# Altium PCB bop_it_pcb.PcbDoc
Units mil, origin at the board's own origin, x right, y up, seen from the top; angles counter-clockwise.
Board outline 2245 x 3290 mil, 2 copper layers (Top Layer, Bottom Layer); 23 components, 18 nets, 75 pads, 0 vias.
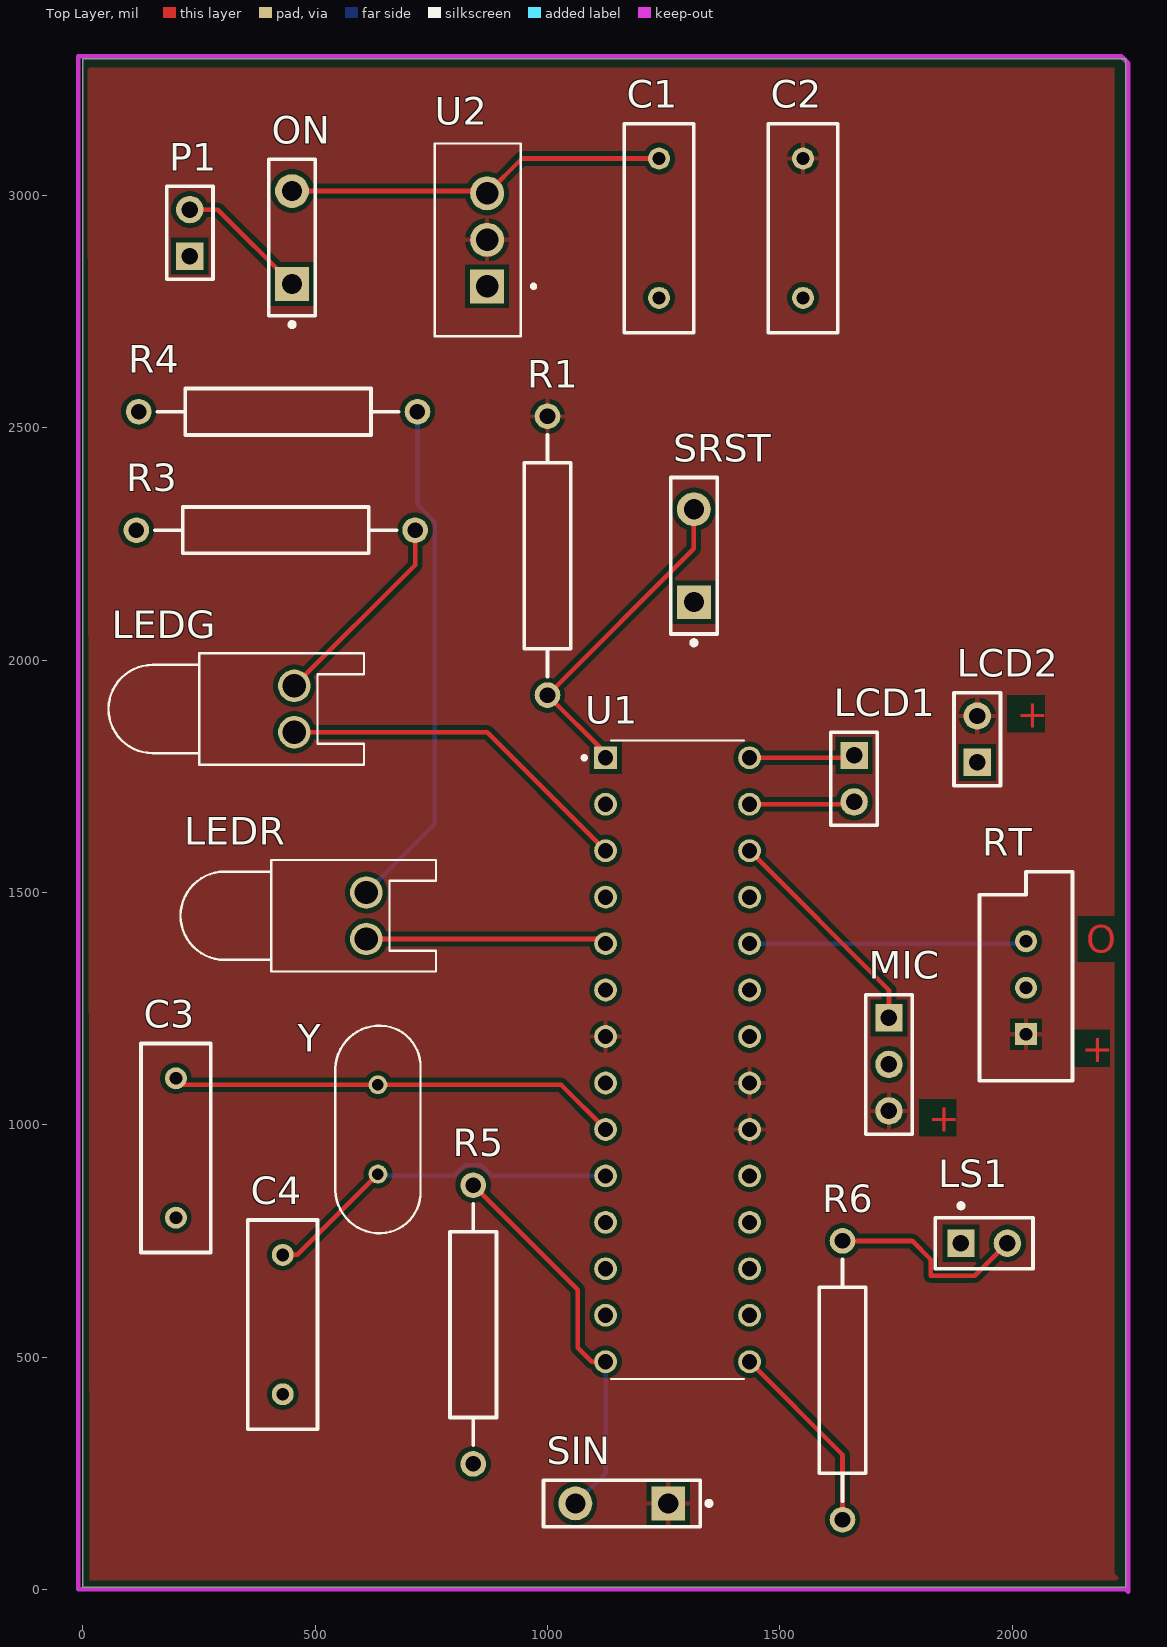
[diagram p0: Top Layer view]
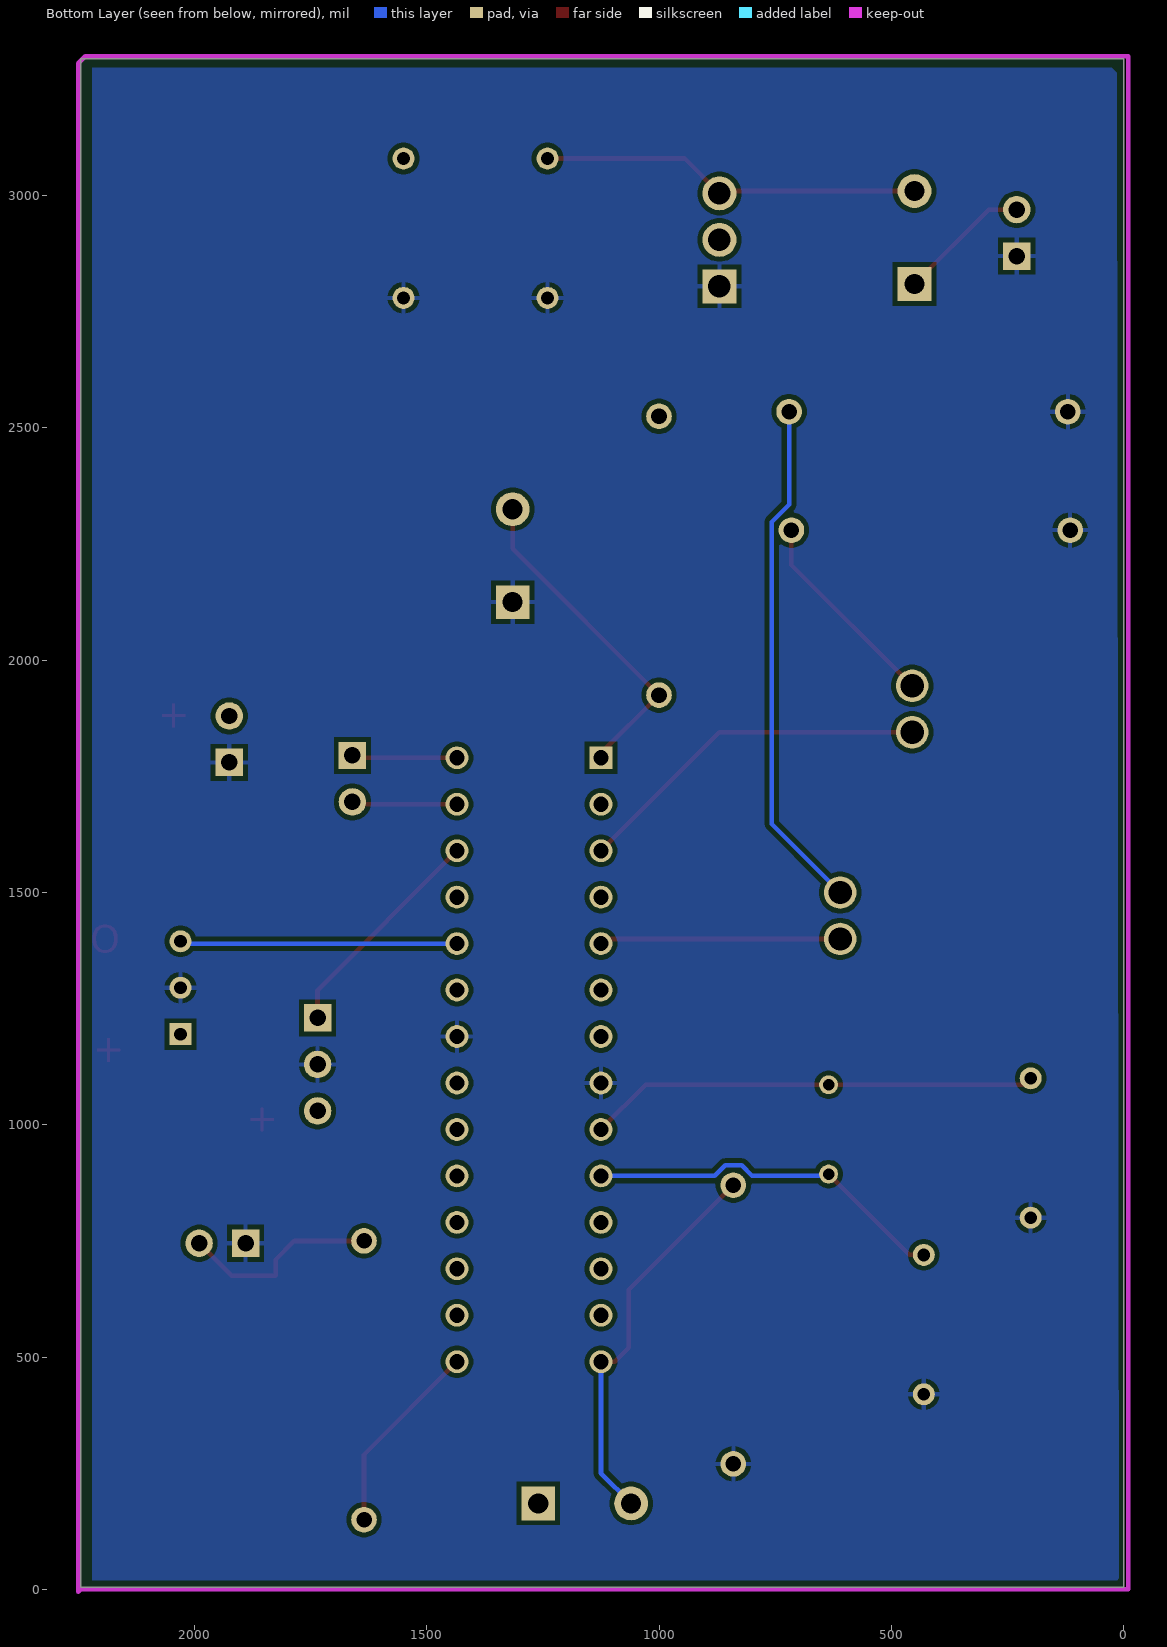
[diagram p1: Bottom Layer view, seen from below]

## Layer stack, top to bottom
Top Solder: solder mask 0.4, Solder Resist, Dk 3.5
Top Layer: signal copper 1.4
Dielectric 1: dielectric 12.6, FR-4, Dk 4.8
Bottom Layer: signal copper 1.4
Bottom Solder: solder mask 0.4, Solder Resist, Dk 3.5

## Board outline
0,5 2245,5 2245,3295 0,3295

## Design rules (kind name [scope] priority, off if disabled: settings)
BoardOutlineClearance [All] p1: gap=7.87 ignorepadtopadclearanceinfootprint=FALSE except(15.75: Arc-SplitBarrior Arc-SplitContinuation Track-SplitBarrior Track-SplitContinuation SMDPad-SplitBarrior SMDPad-SplitContinuation THPad-SplitBarrior THPad-SplitContinuation Via-SplitBarrior Via-SplitContinuation Fill-SplitBarrior Fill-SplitContinuation Poly-SplitBarrior Poly-SplitContinuation Region-SplitBarrior Region-SplitContinuation Text-SplitBarrior Text-SplitContinuation)
Clearance "Clearance Bottom Layer" [OnLayer('Bottom Layer')] p1: gap=8 ignorepadtopadclearanceinfootprint=TRUE except(10: Arc-Text Track-Text SMDPad-Text THPad-Text Via-Text Fill-Text Poly-Text Region-Text Text-Text)
Clearance "Clearance Top Layer" [OnLayer('Top Layer')] p2: gap=8 ignorepadtopadclearanceinfootprint=TRUE except(10: Arc-Text Track-Text SMDPad-Text THPad-Text Via-Text Fill-Text Poly-Text Region-Text Text-Text)
Clearance [All] p3: gap=7.87 ignorepadtopadclearanceinfootprint=FALSE except(3.5: Arc-Arc Arc-Track Arc-SMDPad Track-Track Track-SMDPad SMDPad-SMDPad; 5: Arc-Via Track-Via SMDPad-Via THPad-Via Via-Via; 10: Arc-Text Track-Text SMDPad-Text THPad-Text Via-Text Fill-Text Poly-Text Region-Text Text-Text)
HoleSize [All] p1: absolutevalues=TRUE maxlimit=248.03 minlimit=7.87 maxpercent=80.000 minpercent=20.000
MinimumAnnularRing [All] p1: minimumring=3
MinimumSolderMaskSliver [All] p1: minsoldermaskwidth=3.94
PolygonConnect PolygonConnect_1 [All] p1: thpad.connectstyle=Relief thpad.reliefconductorwidth=20 thpad.reliefentries=4 thpad.polygonreliefangle="90 Angle" thpad.airgapwidth=10 smdpad.connectstyle=Relief smdpad.reliefconductorwidth=20 smdpad.reliefentries=4 smdpad.polygonreliefangle="90 Angle" smdpad.airgapwidth=10 via.connectstyle=Direct via.reliefconductorwidth=20 via.reliefentries=4 via.polygonreliefangle="90 Angle" via.airgapwidth=10
RoutingCorners [All] p1: cornerstyle=Round minsetback=100 maxsetback=100
RoutingVias [All] p1: holewidth=19.68 width=39.37 viastyle="Through Hole" minholewidth=7.87 minwidth=17.72 maxholewidth=39.37 maxwidth=78.74
SilkToSilkClearance [All] p1: silktosilkclearance=3.94
SilkToSolderMaskClearance [IsPad] p1: minsilkscreentomaskgap=3.94 clearancetoexposedcopper=TRUE
SolderMaskExpansion [All] p1: expansion=4 istentingtop=FALSE
Width [All] p1: maxlimit=100 minlimit=3.5 preferedwidth=15
25 further rules are at their usual default settings.

## Components (designator, comment, footprint, x,y, rotation, side; value= is the part's Value field where it differs from the comment)
C1 "Cap" RAD-0.3 1240,2930 r90 top value=10uF
C2 "Cap" RAD-0.3 1550,2930 r90 top value=10uF
C3 "Cap" RAD-0.3 200,950 r90 top value=22pF
C4 "Cap" RAD-0.3 430,570 r90 top value=22pF
LCD1 "Header 2" HDR1X2 1660,1795 r270 top
LCD2 "Header 2" HDR1X2 1925,1780 r90 top
LEDG "LED0" LED-0 455,1895 r270 top
LEDR "LED0" LED-0 610,1450 r270 top
LS1 "Speaker" PIN2 1890,745 r0 top
MIC "Header 3" HDR1X3 1735,1230 r270 top
ON "SW-SPST" SPST-2 450,2910 r90 top
P1 "Header 2" HDR1X2 230,2870 r90 top
R1 "Res Adj2" AXIAL-0.6 1000,2225 r90 top value=1K
R3 "Res Adj2" AXIAL-0.6 415,2280 r180 top value=1K
R4 "Res Adj2" AXIAL-0.6 420,2535 r180 top value=1K
R5 "Res Adj2" AXIAL-0.6 840,570 r90 top value=1K
R6 "Res Adj2" AXIAL-0.6 1635,450 r270 top value=1K
RT "RPot" VR5 2030,1295 r90 top value=1K
SIN "SW-PB" SPST-2 1160,185 r180 top
SRST "SW-PB" SPST-2 1315,2225 r90 top
U1 "ATMEGA328-PU" DIP787W46P254L3467H508Q28 1280,1140 r0 top
U2 "7805" TO254P1054X470X1955-3 870,2905 r90 top
Y "ECS-240.0001-18-1X" XTAL_ECS-200-20-1X 635,990 r90 top

## Footprints (in the part's own frame and the unit in brackets; to place one, negate y for a bottom-side part, rotate by r counter-clockwise, add the part's x,y. Pads: shape width x height; smd on the part's side, far side on the other; paste and mask are expansions set on the pad)
AXIAL-0.6 [mm] "Axial Device, Thru-Hole; 2 Leads; 0.6 in Pin Spacing"
  round 1.4 hole 0.85: 1(-7.62,0) 2(7.62,0)
  silkscreen extent -6.6,-1.27 6.6,1.27
DIP787W46P254L3467H508Q28 [mm]
  rect 1.25x1.25 hole 0.83: 1(-3.937,16.51)
  round 1.25 hole 0.83: 2(-3.937,13.97) 3(-3.937,11.43) 4(-3.937,8.89) 5(-3.937,6.35) 6(-3.937,3.81) 7(-3.937,1.27) 8(-3.937,-1.27) 9(-3.937,-3.81) 10(-3.937,-6.35) 11(-3.937,-8.89) 12(-3.937,-11.43) 13(-3.937,-13.97) 14(-3.937,-16.51) 15(3.937,-16.51) 16(3.937,-13.97) 17(3.937,-11.43) 18(3.937,-8.89) 19(3.937,-6.35) 20(3.937,-3.81) 21(3.937,-1.27) 22(3.937,1.27) 23(3.937,3.81) 24(3.937,6.35) 25(3.937,8.89) 26(3.937,11.43) 27(3.937,13.97) 28(3.937,16.51)
  silkscreen extent -5.2,-17.45 3.62,17.45, body extent -5.08,-17.34 5.08,17.34, height 4.57
HDR1X2 [mm] "Connector; Header; 2 Position"
  rect 1.5x1.5 hole 0.9: 1(0,0)
  round 1.5 hole 0.9: 2(2.54,0)
  silkscreen extent -1.27,-1.27 3.81,1.27
HDR1X3 [mm] "Connector; Header; 3 Position"
  rect 1.5x1.5 hole 0.9: 1(0,0)
  round 1.5 hole 0.9: 2(2.54,0) 3(5.08,0)
  silkscreen extent -1.27,-1.27 6.35,1.27
LED-0 [mil] "LED; 2 Leads"
  round 70 hole 50: 1(50,0) 2(-50,0)
  silkscreen extent -120,-400 120,150
PIN2 [mm] "Photosensitive Diode; 2 Leads"
  rect 1.5x1.5 hole 0.9: 1(0,0)
  round 1.5 hole 0.9: 2(2.54,0)
  silkscreen extent -1.4,-1.4 3.94,2.17
RAD-0.3 [mm] "Radial Cap, Thru-Hole; 2 Leads; 0.3 in Pin Spacing"
  round 1.2 hole 0.7: 1(-3.81,0) 2(3.81,0)
  silkscreen extent -5.71,-1.91 5.71,1.91
SPST-2 [mm] "Switch; 2 Leads"
  rect 1.85x1.85 hole 1.1: 1(-2.54,0)
  round 1.85 hole 1.1: 2(2.54,0)
  silkscreen extent -4.89,-1.27 4.28,1.27
TO254P1054X470X1955-3 [mm]
  rect 1.86x1.86 hole 1.24: 1(-2.54,0)
  round 1.86 hole 1.24: 2(0,0) 3(2.54,0)
  silkscreen extent -5.27,-2.64 5.27,2.86, body extent -5.08,-2.29 5.08,2.29, height 19.56
VR5 [mm] "Thru-Hole; 3 Leads"
  rect 1.2x1.2 hole 0.7: 1(-2.54,0)
  round 1.2 hole 0.7: 2(0,0) 3(2.54,0)
  silkscreen extent -5.08,-2.54 6.35,2.54
XTAL_ECS-200-20-1X [mm]
  round 1.03 hole 0.63: 1(-2.44,0) 2(2.44,0)
  silkscreen extent -5.68,-2.33 5.68,2.33

## Part data
C1 C2 C3 C4: "Capacitor", LatestRevisionDate=17-Jul-2002, LatestRevisionNote="Re-released for DXP Platform.", PackageDescription="Radial Cap, Thru-Hole; 2 Leads; 0.3 in Pin Spacing", PackageReference=RAD-0.3, Published=8-Jun-2000, Publisher="Altium Limited"
LCD1 LCD2 P1: "Header, 2-Pin", LatestRevisionDate=17-Jul-2002, LatestRevisionNote="Re-released for DXP Platform.", Publisher="Altium Limited"
LEDG LEDR: "Typical INFRARED GaAs LED", LatestRevisionDate=08-Jul-2005, LatestRevisionNote="Mech Layer 1 removed.", PackageDescription="LED; 2 Leads", PackageReference=LED-0, Published=8-Jun-2000, Publisher="Altium Limited"
LS1: "Loudspeaker", LatestRevisionDate=17-Jul-2002, LatestRevisionNote="Re-released for DXP Platform.", PackageReference=PIN2, Published=24-Mar-1999, Publisher="Altium Limited"
MIC: "Header, 3-Pin", LatestRevisionDate=17-Jul-2002, LatestRevisionNote="Re-released for DXP Platform.", Publisher="Altium Limited"
ON: "Single-Pole, Single-Throw Switch", LatestRevisionDate=17-Jul-2002, LatestRevisionNote="Re-released for DXP Platform.", PackageDescription="Switch; 2 Leads", PackageReference=SPST-2, Published=24-Mar-1999, Publisher="Altium Limited"
R1 R3 R4 R5 R6: "Variable Resistor", LatestRevisionDate=17-Jul-2002, LatestRevisionNote="Re-released for DXP Platform.", PackageDescription="Axial Device, Thru-Hole; 2 Leads; 0.6 in Pin Spacing", PackageReference=AXIAL-0.6, Published=8-Jun-2000, Publisher="Altium Limited", Set Position=0.5
RT: "Potentiometer", LatestRevisionDate=17-Jul-2002, LatestRevisionNote="Re-released for DXP Platform.", PackageDescription="Variable Resistor, Thru-Hole; 3 Leads", PackageReference=VR5, Published=8-Jun-2000, Publisher="Altium Limited", Set Position=0.5, Sim Note="Enter the Resistance value and the set point into parameter fields."
SIN SRST: "Switch", LatestRevisionDate=17-Jul-2002, LatestRevisionNote="Re-released for DXP Platform.", PackageDescription="Switch; 2 Leads", PackageReference=SPST-2, Published=24-Mar-1999, Publisher="Altium Limited"
U1: "AVR AVRÂ® ATmega Microcontroller IC 8-Bit 20MHz 32KB (16K x 16) FLASH 28-PDIP", Package="DIP-28 Microchip Technology", Availability=Good, Check_prices=https://www.snapeda.com/parts/ATMEGA328-PU/Microchip/view-part/4833845/?ref=eda, MF="Microchip Technology", MP=ATMEGA328-PU, Price=None, Purchase-URL=https://pricing.snapeda.com/search/part/ATMEGA328-PU/?ref=eda, SnapEDA_Link=https://www.snapeda.com/parts/ATMEGA328-PU/Microchip/view-part/4833845/?ref=snap
U2: library part LM1085IT-5.0, "3-A, 29-V, linear voltage regulator 3-TO-220", Package="TO-220-3 Texas Instruments", Availability=Warning, MF="Texas Instruments", MP=LM1085IT-5.0, Price=None, Purchase-URL=https://pricing.snapeda.com/search/part/LM1085IT-5.0/?ref=eda, SnapEDA_Link=https://www.snapeda.com/parts/LM1085IT-5.0/Texas%20Instruments/view-part/226095/?ref=snap
Y: "Crystals / Oscillators / Resonators 24.00014MHz 18pF", Package="HC49/U ECS International", Availability=Unavailable, MF="ECS International", MP=ECS-240.0001-18-1X, Price=None, SnapEDA_Link=https://www.snapeda.com/parts/ECS-240.0001-18-1X/ECS%20International/view-part/259232/?ref=snap

## Nets (pads, with @x,y where several pads share a name; then routed paths per layer and width w, separated by ;. In a path a pad name is that pad's centre, name@x,y a point inside that pad or via, vN(x,y) a via of type N, cw(c..) or ccw(c..) an arc to the next point about the centre after c; other vN are vias at no path point)
GND: C1.1 C2.1 C3.1 C4.1 LCD2.1 LS1.1 MIC.2 P1.1 R3.2 R4.2 R5.1 RT.2 SRST.1 U1.8 U1.22 U2.1
NetC1_2: C1.2 ON.2 U2.3 | length 823.1
  Top Layer w10: ON.2 865,3010 U2.3 945,3080 C1.2
NetC3_2: C3.2 U1.9 Y.2 | length 970.6
  Top Layer w10: C3.2 213.94,1086.06 1028.94,1086.06 U1.9
NetC4_2: C4.2 U1.10 Y.1 | length 787.4
  Top Layer w10: C4.2 461.06,720 Y.1
  Bottom Layer w10: Y.1 638.94,890 799.81,890 822.37,912.56 857.63,912.56 880.19,890 U1.10
NetLEDG_1: LEDG.1 U1.3 | length 775.6
  Top Layer w10: LEDG.1 870,1845 U1.3
NetLEDG_2: LEDG.2 R3.1 | length 442.7
  Top Layer w10: LEDG.2 715,2205 R3.1
NetLEDR_1: LEDR.1 U1.5 | length 519.1
  Top Layer w10: LEDR.1 1115,1400 U1.5
NetLEDR_2: LEDR.2 R4.1 | length 1111.7
  Bottom Layer w10: LEDR.2 757.56,1647.56 757.56,2297.63 720,2335.19 R4.1
NetLS1_2: LS1.2 R6.1 | length 435.6
  Top Layer w10: R6.1 1785,750 1825,710 1825,675 1920,675 LS1.2
NetMIC_1: MIC.1 U1.26 | length 484.3
  Top Layer w10: U1.26 1735,1290 MIC.1
NetR1_1: R1.1 SRST.2 U1.1 | length 717.3
  Top Layer w10: U1.1 1125,1800 R1.1 1315,2240 SRST.2
NetR5_2: R5.2 SIN.2 U1.14 | length 847.5
  Top Layer w10: R5.2 1065,645 1065,520 1095,490 U1.14
  Bottom Layer w10: SIN.2 1125,250 U1.14
NetR6_2: R6.2 U1.15 | length 422.8
  Top Layer w10: U1.15 1635,290 R6.2
NetRT_3: RT.3 U1.24 | length 597.1
  Bottom Layer w10: U1.24 2025,1390 RT.3
PWR: C2.2 LCD2.2 MIC.3 R1.2 RT.1 SIN.1 U1.7 U1.20 U1.21 U2.2
SCL: LCD1.1 U1.28 | length 227.1
  Top Layer w10: U1.28 1655,1790 LCD1.1
SDA: LCD1.2 U1.27 | length 227.1
  Top Layer w10: U1.27 1655,1690 LCD1.2
Vc: ON.1 P1.2 | length 286.3
  Top Layer w10: P1.2 290,2970 ON.1
pads on no net: U1.2 U1.4 U1.6 U1.11 U1.12 U1.13 U1.16 U1.17 U1.18 U1.19 U1.23 U1.25

## Polygon pours and split planes (outlines as drawn)
GND on Bottom Layer "GND_L02_P001" (solid, pour order 1): 15,3265 25,3275 2220,3275 2220,20 10,20
PWR on Top Layer "PWR_L01_P003" (solid, pour order 3): 10,3275 2220,3275 2220,35 2230,25 2225,20 15,20

## Keep-outs
Keep-Out Layer:
  lines w10: -10,0 -10,3300 2235,3300 2250,3285 2250,-5 2245,0 -10,0

## Other copper
Top Layer:
  text "+" at 2010,1855 h60
  text "O" at 2160,1370 h60
  text "+" at 2150,1135 h60
  text "+" at 1820,985 h60